# Altium PCB PWM Driver.PcbDoc
Units mil, origin at the board's own origin, x right, y up, seen from the top; angles counter-clockwise.
Board outline 2400 x 1000 mil, 2 copper layers (Top Layer, Bottom Layer); 22 components, 15 nets, 75 pads, 0 vias.
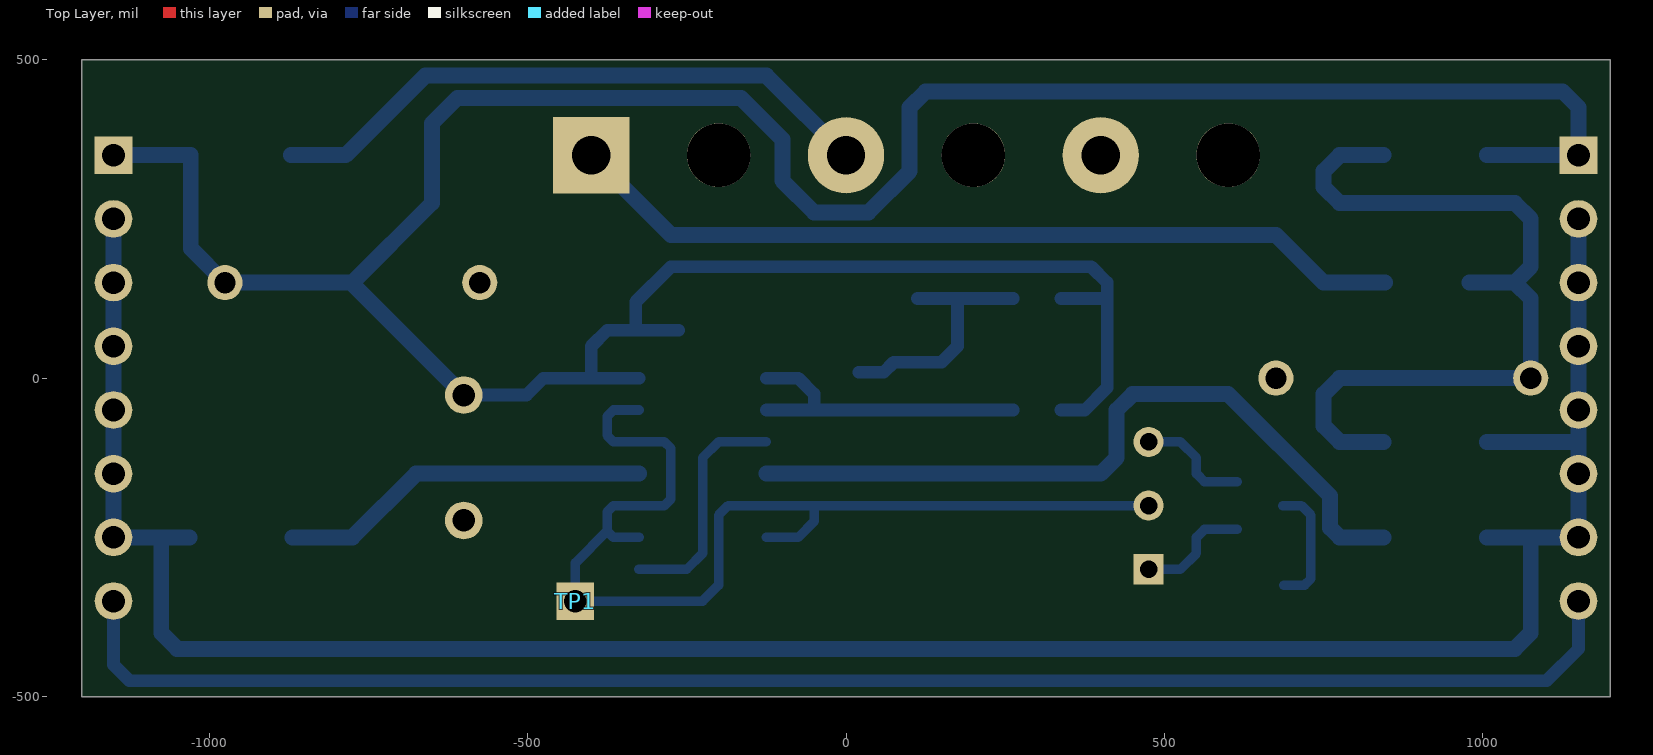
[diagram p0: Top Layer view]
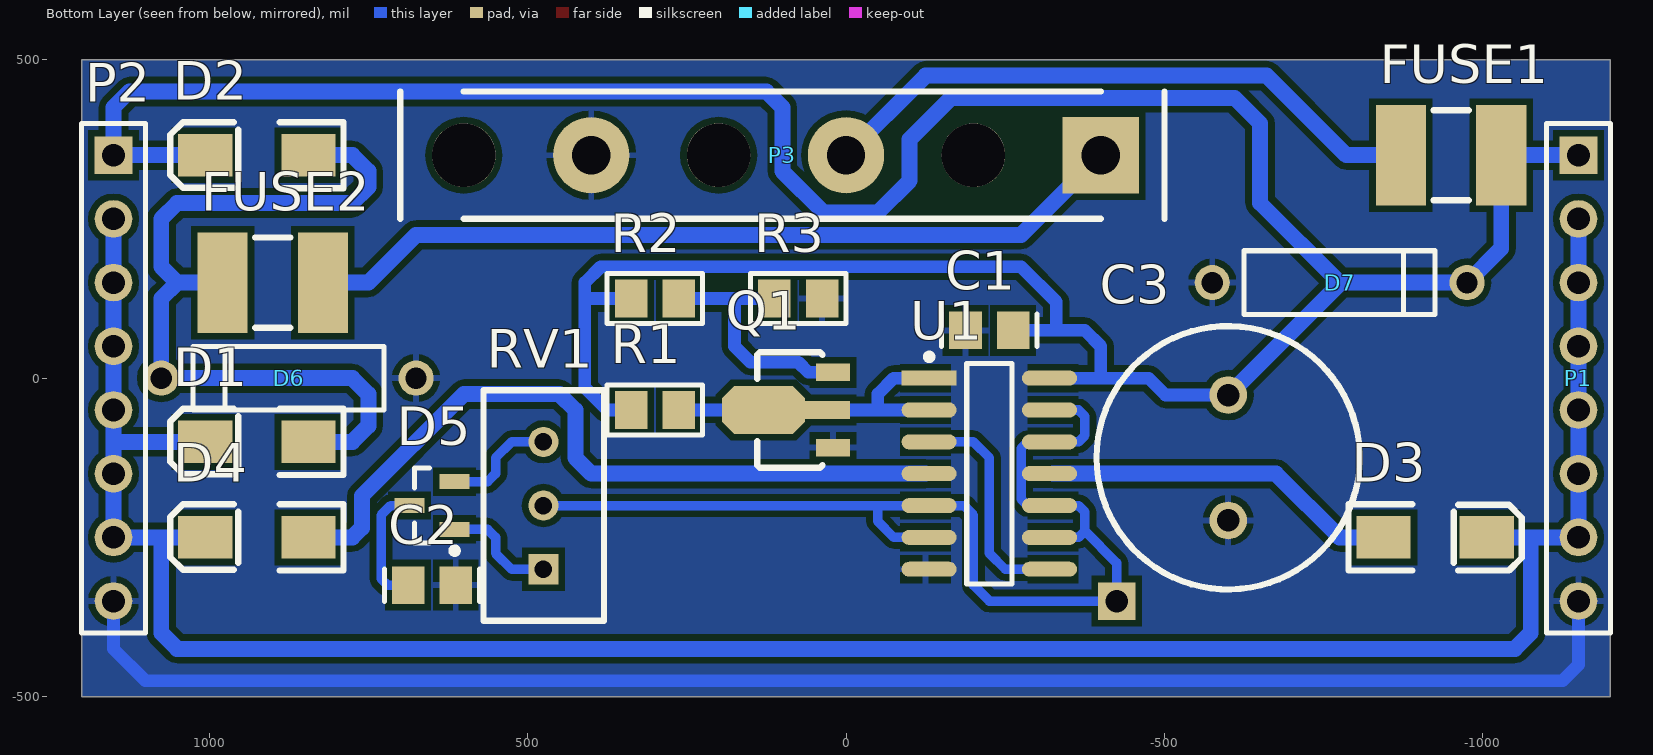
[diagram p1: Bottom Layer view, seen from below]

## Layer stack, top to bottom
Top Layer: signal copper 1.4
Dielectric: dielectric 12.6, FR-4, Dk 4.8
Bottom Layer: signal copper 1.4

## Board outline
-1200,-400 -1200,500 1200,500 1200,-500 -1200,-500

## Design rules (kind name [scope] priority, off if disabled: settings)
Clearance [All] p1: gap=10
PolygonConnect [All] p1: connectstyle=Relief reliefconductorwidth=10 reliefentries=4 polygonreliefangle="90 Angle" airgapwidth=10
RoomDefinition "PWM Driver" [InComponentClass('PWM Driver')] p1: confinementstyle=ConfineIn formatcopy=TRUE lockcomponents=FALSE outline -1200,-400 1200,-400 1200,400 -1200,400
RoutingVias [All] p1: holewidth=28 width=50 viastyle="Through Hole" minholewidth=28 minwidth=50 maxholewidth=100 maxwidth=100
SolderMaskExpansion [All] p1: expansion=4
Width [All] p1: maxlimit=100 minlimit=10 preferedwidth=10
28 further rules are at their usual default settings.

## Components (designator, comment, footprint, x,y, rotation, side; value= is the part's Value field where it differs from the comment)
C1 "100nF" "CAP (3D) - 0805" -225,75 r180 bottom
C2 "100nF" "CAP (3D) - 0805" 650,-325 r0 bottom
C3 "" RB5-10.5 -600,-125 r270 bottom
D1 "S1M" DO-214AC 925,-100 r0 bottom
D2 "S1M" DO-214AC 925,350 r0 bottom
D3 "S1M" DO-214AC -925,-250 r180 bottom
D4 "S1M" DO-214AC 925,-250 r0 bottom
D5 "BAV99" SOT23-3L 650,-200 r0 bottom
D6 "15V" 1N4001 875,0 r180 bottom (schematic designator D3)
D7 "15V" 1N4001 -775,150 r0 bottom (schematic designator D3)
FUSE1 "500mA" "miniSMD Polyswitch" -950,350 r180 bottom
FUSE2 "500mA" "miniSMD Polyswitch" 900,150 r0 bottom
P1 "Header 8" HDR1X8 -1150,350 r270 bottom
P2 "Header 8" HDR1X8 1150,350 r270 bottom
P3 "Header 3" TAIL 100,250 r0 bottom
Q1 "BCX56" SOT89 75,-50 r90 bottom
R1 "Res2" "RES (3D) - 0805" 300,-50 r0 bottom
R2 "Res2" "RES (3D) - 0805" 300,125 r0 bottom
R3 "Res2" "RES (3D) - 0805" 75,125 r0 bottom
RV1 "10k" "TRIMPOT (10 TURN)" 475,-200 r90 bottom
TP1 "TestPoint" TP_TH -425,-350 r0 top
U1 "CD4011" SOIC-14 -225,-150 r270 bottom

## Footprints (in the part's own frame and the unit in brackets; to place one, negate y for a bottom-side part, rotate by r counter-clockwise, add the part's x,y. Pads: shape width x height; smd on the part's side, far side on the other; paste and mask are expansions set on the pad)
1N4001 [mm] "Axial Device, Thru-Hole; 2 Leads; 0.5 in Pin Spacing"
  round 1.4 hole 0.85: 1(5.08,0) 2(-5.08,0)
  silkscreen extent -3.81,-1.27 3.81,1.27, body extent -5.35,-1.01 5.36,1.01, height 2.28
"CAP (3D) - 0805" [mm]
  rect 1.3x1.5 smd: 1(-0.95,0) 2(0.95,0)
  silkscreen extent -1.9,-0.65 1.9,0.65, body extent -1,-0.63 1,0.63, height 1
DO-214AC [mil]
  rect 85x67 smd: 1(-81,0) 2(81,0)
  silkscreen extent -136,-52 136,52, body extent -79,-39 79,39, height 61
HDR1X8 [mm] "Connector; Header; 8 Position"
  rect 1.5x1.5 hole 0.9: 1(0,0)
  round 1.5 hole 0.9: 2(2.54,0) 3(5.08,0) 4(7.62,0) 5(10.16,0) 6(12.7,0) 7(15.24,0) 8(17.78,0)
  silkscreen extent -1.27,-1.27 19.05,1.27
"miniSMD Polyswitch" [mm] "RAYCHEM - MINISMDC050F-2"
  rect 2x4 smd: 1(-2,0) 2(2,0)
  silkscreen extent -0.7,-1.8 0.7,1.8, body extent -2.4,-1.7 2.4,1.7, height 0.62
RB5-10.5 [mm] "Capacitor (Radial); 2 Leads"
  round 1.5 hole 0.9: 1(-2.5,0) 2(2.5,0)
  silkscreen extent -5.25,-5.25 5.25,5.25
"RES (3D) - 0805" [mm]
  rect 1.3x1.5 smd: 1(-0.95,0) 2(0.95,0)
  silkscreen extent -1.91,-0.99 1.91,0.99, body extent -1,-0.63 1,0.63, height 1
SOIC-14 [mm] "SOIC-14  NARROW BODY"
  rect 0.6x2.2 smd: 1(-3.81,-2.4)
  oval 0.6x2.2 smd: 2(-2.54,-2.4) 3(-1.27,-2.4) 4(0,-2.4) 5(1.27,-2.4) 6(2.54,-2.4) 7(3.81,-2.4) 8(3.81,2.4) 9(2.54,2.4) 10(1.27,2.4) 11(0,2.4) 12(-1.27,2.4) 13(-2.54,2.4) 14(-3.81,2.4)
  silkscreen extent -4.78,-2.53 4.4,0.9, body extent -4.37,-3 4.38,3, height 1.75
SOT23-3L [mm] "SOT23, 3-Leads, Body 2.9x1.3mm, Pitch 0.95mm, Lead Span 2.5mm, IPC High Density"
  rect 1.2x0.6 smd: 1(-0.9,0.95) 2(-0.9,-0.95) 3(0.9,0)
  silkscreen extent -1.02,-1.5 0.7,1.92, body extent -1.25,-1.5 1.25,1.5, height 1.12
SOT89 [mm]
  rect 0.7x1.35 smd: 1(1.5,-1.388) 3(-1.5,-1.388)
  rect 0.7x1.8 smd: 2(0,-1.163)
  oct 1.9x3.3 smd: 2(0,1.388)
  silkscreen extent -2.3,-0.97 2.3,1.63, body extent -2.3,-1.91 2.3,2.34, height 1.62
TAIL [mil] "Connector; Header; 3 Position"
  rect 120x120 hole 60: 1(-500,-100)
  round 120 hole 60: 2(-100,-100) 3(300,-100)
  round 100 hole 100: H1(-300,-100) H2(100,-100) H3(500,-100)
  silkscreen extent -600,-200 600,0
TP_TH [mm]
  rect 1.5x1.5 hole 0.9: 1(0,0)
"TRIMPOT (10 TURN)" [mm] "Thru-Hole; 3 Leads"
  rect 1.2x1.2 hole 0.7: 1(-2.54,0)
  round 1.2 hole 0.7: 2(0,0) 3(2.54,0)
  silkscreen extent -4.6,-2.41 4.6,2.39, body extent -4.6,-2.41 4.6,2.39, height 12.02

## Part data
C1 C2: library part Cap, "Capacitor"
C3: library part "Cap Pol2", "Polarized Capacitor (Axial)"
D1 D2 D3 D4: library part DIODE, "DIODE, POWER"
D5: "DUAL DIODE, BAV99"
D6 D7: library part "D Zener", "ZENER 12V 1W"
FUSE1 FUSE2: library part "POLYSWITCH 500mA", "POLYSWITCH 500mA"
P1 P2: "Header, 8-Pin"
P3: "Header, 3-Pin"
Q1: "PNP Bipolar Transistor"
R1 R2 R3: "Resistor"
RV1: library part "VAR (POT) SMD", "Variable Resistor"
U1: "Quadruple 2-Input Positive-NAND Gate"

## Nets (pads, with @x,y where several pads share a name; then routed paths per layer and width w, separated by ;. In a path a pad name is that pad's centre, name@x,y a point inside that pad or via, vN(x,y) a via of type N, cw(c..) or ccw(c..) an arc to the next point about the centre after c; other vN are vias at no path point)
BRAKE: FUSE2.1 P3.1 | length 1329.1
  Bottom Layer w25: P3.1 -275,225 675,225 750,150 FUSE2.1 FUSE2.1@846.26,150
DRIVE: D1.2 D3.2 D4.2 P1.2 P1.3 P1.4 P1.5 P1.6 P1.7 P2.2 P2.3 P2.4 P2.5 P2.6 P2.7 | length 3877.7
  Bottom Layer w25: P1.2 P1.3 P1.4 P1.5 P1.6 P1.7 -1075,-250 ; D3.2@-1031,-250 -1075,-250 ; D4.2 1075,-250 ; D1.2 1150,-100 ; P2.2 P2.3 P2.4 P2.5 P2.6 P2.7 1075,-250 ; -1075,-250 -1075,-400 -1050,-425 1050,-425 1075,-400 1075,-250
GND: C1.1 C2.1 C3.2 D6.1 D7.1 P1.8 P2.8 P3.3 Q1.3 R3.1 U1.7 | length 2506.1
  Bottom Layer w20: P1.8 -1150,-450 -1125,-475 1100,-475 1150,-425 P2.8
NetC2_2: C2.2 D5.3 | length 197.5
  Bottom Layer w15: D5.3 715,-200 730,-215 730,-315 720,-325 C2.2
NetD1_1: D1.1 D2.1 D6.2 FUSE2.2 | length 1306.7
  Bottom Layer w25: D1.1 775,-100 750,-75 750,-25 775,0 D6.2 1075,125 1050,150 ; D2.1 775,350 750,325 750,300 775,275 1050,275 1075,250 1075,175 1050,150 ; FUSE2.2 1050,150
NetD3_1: D3.1 U1.11 | length 585.4
  Bottom Layer w25: D3.1@-869,-250 D3.1 -775,-250 -675,-150 U1.11@-325,-150
NetD4_1: D4.1 U1.4 | length 1187.2
  Bottom Layer w25: U1.4@-125,-150 400,-150 425,-125 425,-50 450,-25 600,-25 760,-185 760,-235 775,-250 D4.1
NetD5_1: D5.1 RV1.1 | length 180.1
  Bottom Layer w15: RV1.1 525,-300 550,-275 550,-250 562.6,-237.4 D5.1
NetD5_2: D5.2 RV1.3 | length 180.1
  Bottom Layer w15: RV1.3 525,-100 550,-125 550,-150 562.6,-162.6 D5.2
NetQ1_1: Q1.1 R2.1 R3.2 | length 396.8
  Bottom Layer w20: Q1.1 59.05,9.05 75,25 150,25 175,50 175,125 ; R3.2 175,125 ; R2.1 175,125
NetQ1_2: Q1.2 R1.1 U1.1 U1.2 | length 498
  Bottom Layer w20: U1.2@-125,-50 -50,-50 ; U1.1@-125,0 -75,0 -50,-25 -50,-50 ; Q1.2@129.62,-50 29.23,-50 -50,-50 ; Q1.2@129.63,-50 R1.1
NetU1_3: U1.3 U1.8 | length 370.7
  Bottom Layer w15: U1.8@-325,-300 U1.8 -250,-300 -225,-275 -225,-125 -200,-100 U1.3 U1.3@-125,-100
PARK: FUSE1.1 P3.2 | length 974.8
  Bottom Layer w25: FUSE1.1 -785.63,350 -660.63,475 -125,475 P3.2
PWM: RV1.2 TP1.1 U1.5 U1.6 U1.9 U1.10 U1.12 U1.13 | length 1732.5
  Bottom Layer w15: U1.9@-325,-250 -365,-250 -375,-240 ; U1.13@-325,-50 -365,-50 -375,-60 -375,-90 -365,-100 U1.12 -285,-100 -275,-110 -275,-190 -285,-200 U1.10 -365,-200 -375,-210 -375,-240 ; U1.6@-125,-250 -75,-250 -50,-225 -50,-200 ; RV1.2 -50,-200 ; -375,-240 -425,-290 TP1.1 -225,-350 -200,-325 -200,-215 -185,-200 U1.5 -50,-200
VCC: C1.2 C3.1 D2.2 D7.2 FUSE1.2 P1.1 P2.1 R1.2 R2.2 U1.14 | length 5017.6
  Bottom Layer w20: C3.1 -501.57,-26.57 -475,0 -400,0 ; U1.14@-325,0 -400,0 ; C1.2 -330,75 ; R1.2 375,-50 410,-15 410,125 ; R2.2 410,125 ; -400,0 -400,50 -375,75 -330,75 ; -330,75 -330,120 -275,175 385,175 410,150 410,125
  Bottom Layer w25: P1.1 FUSE1.2 -1028.74,203.74 D7.2 -776.57,150 ; C3.1 -776.57,150 ; D2.2 P2.1 1150,425 1125,450 125,450 100,425 100,325 35,260 -50,260 -100,310 -100,375 -165,440 -610,440 -650,400 -650,275 -775,150 -776.57,150
pads on no net: P3.H1 P3.H2 P3.H3

## Polygon pours and split planes (outlines as drawn)
GND on Bottom Layer "Bottom Layer-No Net" (solid, remove dead copper, pour order 2): -1200,-400 -1200,500 1200,500 1200,-500 -1200,-500

## Silkscreen, mask and mechanical layers (free items; w line width, h text height)
Mechanical 1:
  lines w10: -1200,-500 -1200,-400 -1200,400 -1200,500 1200,500 1200,400 1200,-400 1200,-500 -1200,-500